# EAGLE board DSP (EAGLE 8.6.0)
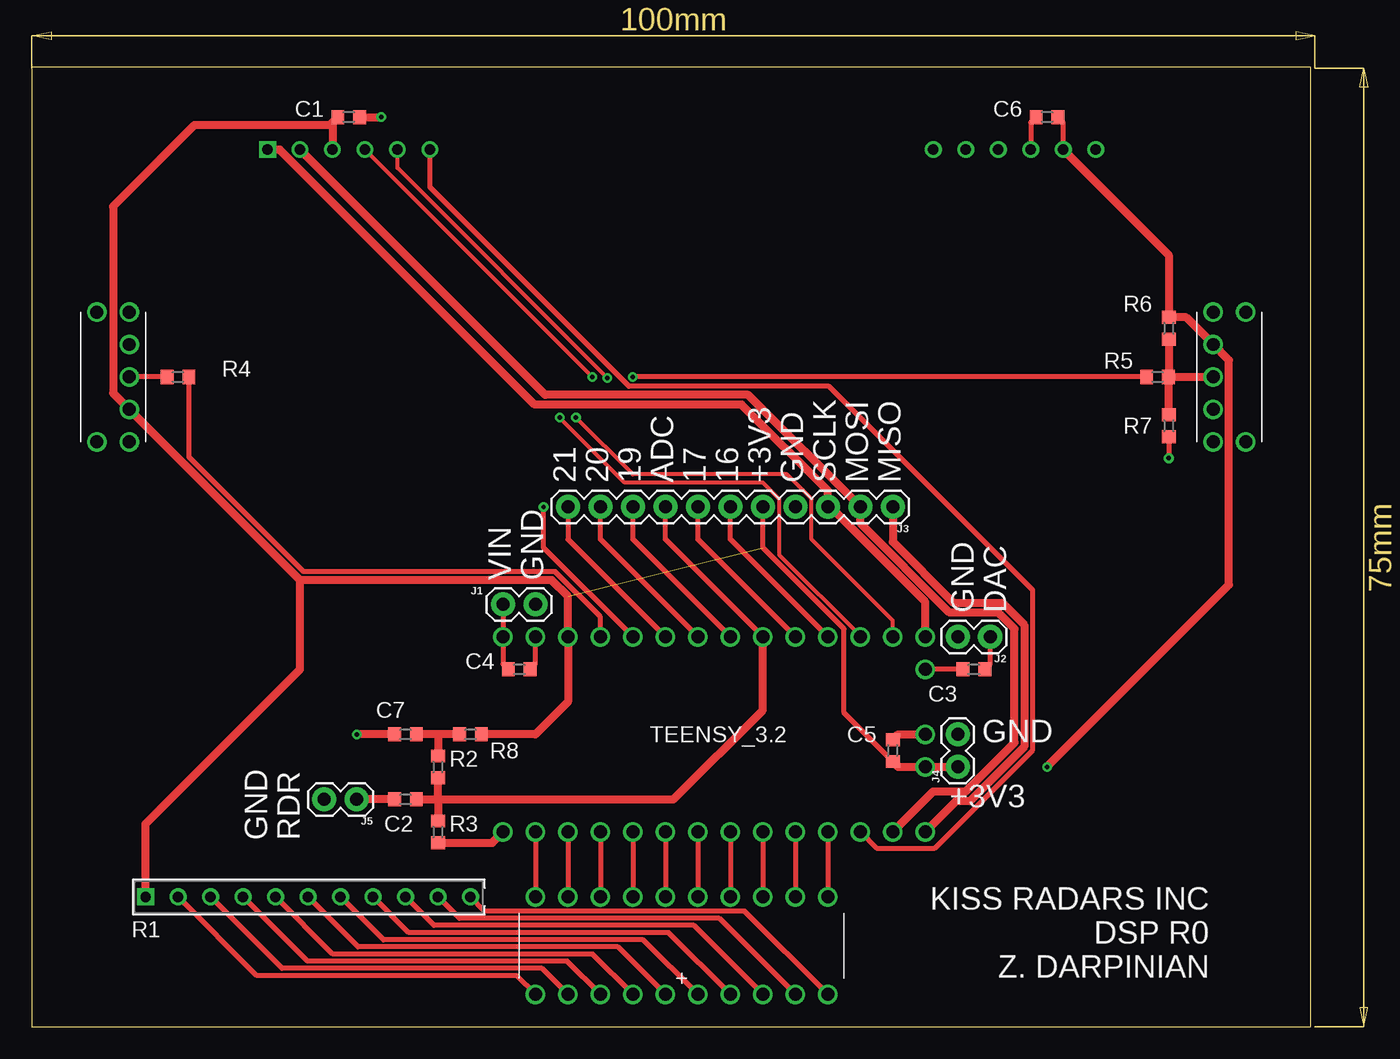
[diagram p0: board, top side]
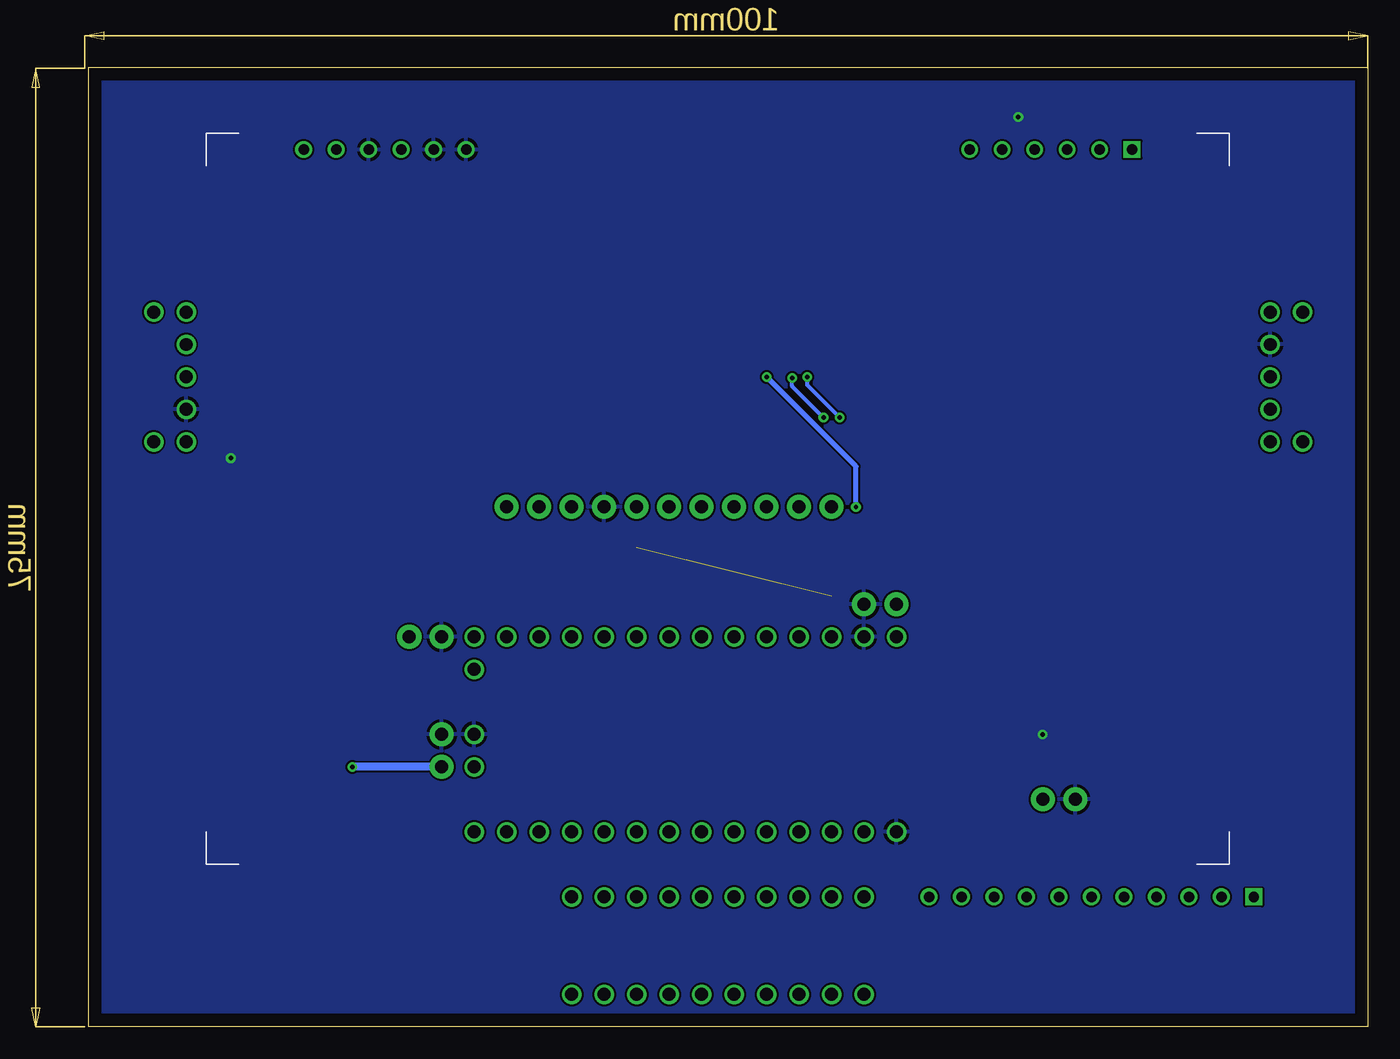
[diagram p1: board, bottom side, seen from below]

Size 100 x 75 mm. Coordinates in mm from the lower left corner, seen from the top.
Outline: 0,0 100,0 100,75 0,75 0,0
Copper layers (1*16): Top 0.035mm / dielectric 1.5mm / Bottom 0.035mm
Design rules "default": minimum track width 6mil, minimum drill 0.35mm, track to track 6mil, track to pad 6mil, pad to pad 6mil, via to via 6mil, smd to smd 6mil, copper to edge 40mil, drill to drill 6mil, minimum pad ring 10mil, minimum via ring 8mil, stop-mask expansion 4mil, vias tented up to drill 0mil, thermal gap 10mil

## Footprints (pad centres in the part's own frame; a part is rotated, then mirrored left to right if it is on the bottom)
0603 = smd 1 x 1.1: 1 -0.85,0; 2 0.85,0
KWL-R1025VB = drill 1.016: 1+ 0,0; 1- 0,7.62; 2+ 2.54,0; 2- 2.54,7.62; 3+ 5.08,0; 3- 5.08,7.62; 4+ 7.62,0; 4- 7.62,7.62; 5+ 10.16,0; 5- 10.16,7.62; 6+ 12.7,0; 6- 12.7,7.62; 7+ 15.24,0; 7- 15.24,7.62; 8+ 17.78,0; 8- 17.78,7.62; 9+ 20.32,0; 9- 20.32,7.62; 10+ 22.86,0; 10- 22.86,7.62
1X02 = drill 1.016 pad 1.88: 1 0,0; 2 2.54,0
1X11 = drill 1.016 pad 1.88: 1 0,0; 2 2.54,0; 3 5.08,0; 4 7.62,0; 5 10.16,0; 6 12.7,0; 7 15.24,0; 8 17.78,0; 9 20.32,0; 10 22.86,0; 11 25.4,0
BO_4611X = drill 0.813 pad 1.321 square: 1 0,0 | drill 0.813 pad 1.321: 2 -2.54,0; 3 -5.08,0; 4 -7.62,0; 5 -10.16,0; 6 -12.7,0; 7 -15.24,0; 8 -17.78,0; 9 -20.32,0; 10 -22.86,0; 11 -25.4,0
NKK_SPDT_BRKT = drill 1.016: 1 0,0; 2 0,-2.54; 3 2.54,-2.54; 4 5.08,-2.54; 5 7.62,-2.54; 6 10.16,-2.54; 7 10.16,0
TEENSY_3.2_SOCKET = drill 1.016: 0 0,-2.54; 1 0,-5.08; 2 0,-7.62; 3 0,-10.16; 3V3 5.08,-33.02; 3V3_LIM 15.24,-5.08; 4 0,-12.7; 5 0,-15.24; 6 0,-17.78; 7 0,-20.32; 8 0,-22.86; 9 0,-25.4; 10 0,-27.94; 11 0,-30.48; 12 0,-33.02; 13 15.24,-33.02; 14 15.24,-30.48; 15 15.24,-27.94; 16 15.24,-25.4; 17 15.24,-22.86; 18 15.24,-20.32; 19 15.24,-17.78; 20 15.24,-15.24; 21 15.24,-12.7; 22 15.24,-10.16; 23 15.24,-7.62; AGND 15.24,-2.54; DAC 12.7,-33.02; GND_0 0,0; GND_1 7.62,-33.02; VIN 15.24,0
NHD-C12864A1Z-FSW-FBW-HTT = drill 0.813 pad 1.321 square: 1 7.62,0 | drill 0.813 pad 1.321: 2 10.16,0; 3 12.7,0; 4 15.24,0; 5 17.78,0; 6 20.32,0; 7 59.69,0; 8 62.23,0; 9 64.77,0; 10 67.31,0; 11 69.85,0; 12 72.39,0

## Placement (x,y rotation side)
C1  0.1uF  [0603]  24.77,71.12 0 top
C2  0.22uF  [0603]  29.21,17.78 0 top
C3  0.1uF  [0603]  73.66,27.94 0 top
C4  0.1uF  [0603]  38.1,27.94 0 top
C5  0.1uF  [0603]  67.31,21.59 90 top
C6  0.1uF  [0603]  79.38,71.12 180 top
C7  0.22uF  [0603]  29.21,22.86 180 top
D1  KWL-R1025VB  [KWL-R1025VB]  39.37,2.54 0 top
J1  [1X02]  36.83,33.02 0 top
J2  [1X02]  74.93,30.48 180 top
J3  [1X11]  67.31,40.64 180 top
J4  [1X02]  72.39,20.32 90 top
J5  [1X02]  25.4,17.78 180 top
R1  4711X_RES  [BO_4611X]  8.89,10.16 180 top
R2  100K  [0603]  31.75,20.32 270 top
R3  100K  [0603]  31.75,15.24 270 top
R4  100K  [0603]  11.43,50.8 180 top
R5  100K  [0603]  88.01,50.8 0 top
R6  100K  [0603]  88.9,54.61 90 top
R7  100K  [0603]  88.9,46.99 90 top
R8  1K  [0603]  34.29,22.86 180 top
S1  NKK_B12AB  [NKK_SPDT_BRKT]  5.08,45.72 90 top
S2  NKK_B18AB  [NKK_SPDT_BRKT]  94.92,55.88 270 top
TEENSY_3.2  TEENSY_3.2_SOCKET  [TEENSY_3.2_SOCKET]  36.83,15.24 90 top
U$1  NHD-C12864A1Z-FSW-FBW-HTT  [NHD-C12864A1Z-FSW-FBW-HTT]  10.79,68.58 180 bottom

## Library data of the parts
C1-C7 D1 R1-R8 S1 S2 TEENSY_3.2 U$1 = kiss_z
J1-J5 = SparkFun-Connectors

## Nets
19: J3.9 TEENSY_3.2.19
20: J3.10 TEENSY_3.2.20
21: J3.11 TEENSY_3.2.21
+3V3: C1.1 C5.1 C6.1 J3.5 J4.1 R1.1 R6.2 R8.1 S1.3 S2.3 TEENSY_3.2.3V3 TEENSY_3.2.3V3_LIM U$1.3 U$1.11
+5V: C4.1 J1.1 TEENSY_3.2.VIN
ADC_IN: C2.2 J3.8 R2.2 R3.1 TEENSY_3.2.18
CS_LCD: TEENSY_3.2.10 U$1.6
CS_PLL: J3.7 TEENSY_3.2.17
CS_POT: J3.6 TEENSY_3.2.16
DAC_OUT: C3.2 J2.1
GND: C1.2 C4.2 C5.2 C6.2 C7.2 J1.2 J2.2 J3.4 J4.2 J5.2 R3.2 R7.1 S1.5 S2.5 TEENSY_3.2.AGND TEENSY_3.2.GND_0 TEENSY_3.2.GND_1 U$1.7 U$1.8 U$1.10
MISO: J3.1 TEENSY_3.2.12
MOSI: J3.2 TEENSY_3.2.11 U$1.2
N$1: C3.1 TEENSY_3.2.DAC
N$2: R5.2 R6.1 R7.2 S2.4
N$3: D1.1+ R1.2
N$4: D1.2+ R1.3
N$5: D1.3+ R1.4
N$6: D1.4+ R1.5
N$7: D1.5+ R1.6
N$8: D1.6+ R1.7
N$9: D1.7+ R1.8
N$10: D1.8+ R1.9
N$11: D1.9+ R1.10
N$12: D1.10+ R1.11
N$13: D1.1- TEENSY_3.2.0
N$14: D1.2- TEENSY_3.2.1
N$15: D1.3- TEENSY_3.2.2
N$16: D1.4- TEENSY_3.2.3
N$17: D1.5- TEENSY_3.2.4
N$18: D1.6- TEENSY_3.2.5
N$19: D1.7- TEENSY_3.2.6
N$20: D1.8- TEENSY_3.2.7
N$21: D1.9- TEENSY_3.2.8
N$22: D1.10- TEENSY_3.2.9
N$23: R4.2 S1.4
N$24: C7.1 R2.1 R8.2
RDR_IN: C2.1 J5.1
REG_LCD: TEENSY_3.2.15 U$1.4
RST_LCD: TEENSY_3.2.14 U$1.5
SCLK: J3.3 TEENSY_3.2.13 U$1.1
SW_MOM: R5.1 TEENSY_3.2.22
SW_TOG: R4.1 TEENSY_3.2.23

## Tracks (layer width: path | path; a pad name or v marks a point on that pad's centre or on a via)
19
  Top 0.406: TEENSY_3.2.19 46.99,38.1 J3.9
20
  Top 0.406: TEENSY_3.2.20 44.45,38.1 J3.10
21
  Top 0.406: J3.11 41.91,38.1 TEENSY_3.2.21
+3V3  (via drill 0.35)  (1 unrouted)
  Top 0.406: U$1.11 80.64,70.7 C6.1 | J3.5 57.15,37.47 63.5,31.11 63.5,24.55 C5.1
  Top 0.61: C5.1 67.73,20.32 TEENSY_3.2.3V3 J4.1 | 20.95,34.92 S1.3 6.35,49.53 6.35,64.14 12.7,70.48 23.28,70.48 C1.1 23.5,70.7 U$1.3 | 20.95,34.92 40.64,34.92 41.91,33.66 TEENSY_3.2.3V3_LIM 41.91,25.4 39.37,22.86 R8.1 | U$1.11 88.9,60.33 R6.2 90.26,55.46 S2.3 93.6,52.12 93.6,34.54 v79.38,20.32 | R1.1 8.89,15.88 20.95,27.94 20.95,34.92
  Bottom 0.61: J4.1 v79.38,20.32
+5V
  Top 0.406: J1.1 TEENSY_3.2.VIN 36.83,28.36 C4.1
ADC_IN
  Top 0.406: TEENSY_3.2.18 49.53,38.1 J3.8
  Top 0.61: C2.2 31.75,17.78 | 31.75,17.78 R2.2 | 31.75,17.78 R3.1 | 31.75,17.78 50.16,17.78 57.15,24.77 TEENSY_3.2.18
CS_LCD
  Top 0.406: TEENSY_3.2.10 66.04,13.97 70.59,13.97 78.26,21.64 78.26,34.14 62.33,50.07 46.69,50.07 31.11,65.64 U$1.6
CS_PLL
  Top 0.406: TEENSY_3.2.17 52.07,38.1 J3.7
CS_POT
  Top 0.406: TEENSY_3.2.16 54.61,38.1 J3.6
DAC_OUT
  Top 0.406: C3.2 74.93,28.36 J2.1
GND  (via drill 0.35)
  Top 0.406: C6.2 78.11,70.7 U$1.10 | R7.1 v88.9,44.45 | C4.2 39.37,28.36 TEENSY_3.2.AGND
  Top 0.61: C5.2 67.73,22.86 TEENSY_3.2.GND_1 | C1.2 v27.3,71.12 | R3.2 35.98,14.39 TEENSY_3.2.GND_0 | C7.2 v25.4,22.86
  pour Bottom: 0,74.93 100.33,74.93 100.33,0 0,0
MISO
  Top 0.61: J3.1 67.31,37.91 72.07,33.15 75.88,33.15 77.6,31.43 77.6,21.91 73.34,17.65 72.26,17.65 TEENSY_3.2.12
MOSI
  Top 0.61: TEENSY_3.2.11 70.48,18.41 73.03,18.41 76.83,22.23 76.83,31.11 75.56,32.38 71.75,32.38 64.77,39.37 J3.2 56,49.41 40.13,49.41 U$1.2
N$1
  Top 0.406: C3.1 TEENSY_3.2.DAC
N$2
  Top 0.61: R7.2 88.9,50.76 | 88.9,50.76 R5.2 S2.4 | R6.1 88.9,50.76
N$3
  Top 0.406: D1.1+ 37.9,4.01 17.58,4.01 R1.2
N$4
  Top 0.406: D1.2+ 39.88,4.57 19.56,4.57 R1.3
N$5
  Top 0.406: D1.3+ 41.86,5.13 21.54,5.13 R1.4
N$6
  Top 0.406: D1.4+ 43.84,5.69 23.52,5.69 R1.5
N$7
  Top 0.406: D1.5+ 45.82,6.25 25.5,6.25 R1.6
N$8
  Top 0.406: D1.6+ 47.8,6.81 27.48,6.81 R1.7
N$9
  Top 0.406: D1.7+ 49.78,7.37 29.46,7.37 R1.8
N$10
  Top 0.406: D1.8+ 51.77,7.92 31.45,7.92 R1.9
N$11
  Top 0.406: D1.9+ 53.75,8.48 33.43,8.48 R1.10
N$12
  Top 0.406: D1.10+ 55.73,9.04 35.41,9.04 R1.11
N$13
  Top 0.406: TEENSY_3.2.0 D1.1-
N$14
  Top 0.406: TEENSY_3.2.1 D1.2-
N$15
  Top 0.406: TEENSY_3.2.2 D1.3-
N$16
  Top 0.406: TEENSY_3.2.3 D1.4-
N$17
  Top 0.406: TEENSY_3.2.4 D1.5-
N$18
  Top 0.406: TEENSY_3.2.5 D1.6-
N$19
  Top 0.406: TEENSY_3.2.6 D1.7-
N$20
  Top 0.406: TEENSY_3.2.7 D1.8-
N$21
  Top 0.406: TEENSY_3.2.8 D1.9-
N$22
  Top 0.406: TEENSY_3.2.9 D1.10-
N$23
  Top 0.406: R4.2 S1.4
N$24
  Top 0.61: R8.2 31.75,22.86 | 31.75,22.86 C7.1 | 31.75,22.86 R2.1
RDR_IN
  Top 0.61: C2.1 J5.1
REG_LCD  (via drill 0.35)
  Top 0.305: TEENSY_3.2.15 64.77,30.56 58.42,36.91 58.42,41.27 57.15,42.55 46.35,42.55 v41.27,47.62 | v43.81,50.8 U$1.4
  Bottom 0.305: v41.27,47.62 43.81,50.16 v43.81,50.8
RST_LCD  (via drill 0.35)
  Top 0.305: TEENSY_3.2.14 67.31,31.75 60.96,38.1 60.96,41.27 59.05,43.18 46.99,43.18 v42.55,47.62 | v45,50.72 28.57,67.14 U$1.5
  Bottom 0.305: v42.55,47.62 45,50.08 v45,50.72
SCLK
  Top 0.61: TEENSY_3.2.13 69.85,33.21 62.42,40.64 J3.3 62.23,41.91 55.5,48.64 39.31,48.64 19.37,68.58 U$1.1
SW_MOM  (via drill 0.35)
  Top 0.406: TEENSY_3.2.22 40.01,37.47 v40.01,40.64 | R5.1 v46.99,50.8
  Bottom 0.406: v40.01,40.64 40.01,43.81 v46.99,50.8
SW_TOG
  Top 0.406: TEENSY_3.2.23 44.45,32.05 40.91,35.59 21.23,35.59 12.28,44.53 R4.1

## Text on the board
tPlace: 21 | 20 | 19 | ADC | 17 | 16 | +3V3 | GND | SCLK | MOSI | MISO | VIN | GND | GND | DAC | GND | +3V3 | GND | RDR | KISS RADARS INC / DSP R0 / Z. DARPINIAN